# Altium PCB PCB_MP3Player(DAC)_V3.0.pcbdoc
Units mil, origin at the board's own origin, x right, y up, seen from the top; angles counter-clockwise.
Board outline 3871.18 x 2553.93 mil, 2 copper layers (Top Layer, Bottom Layer); 41 components, 57 nets, 175 pads, 31 vias.
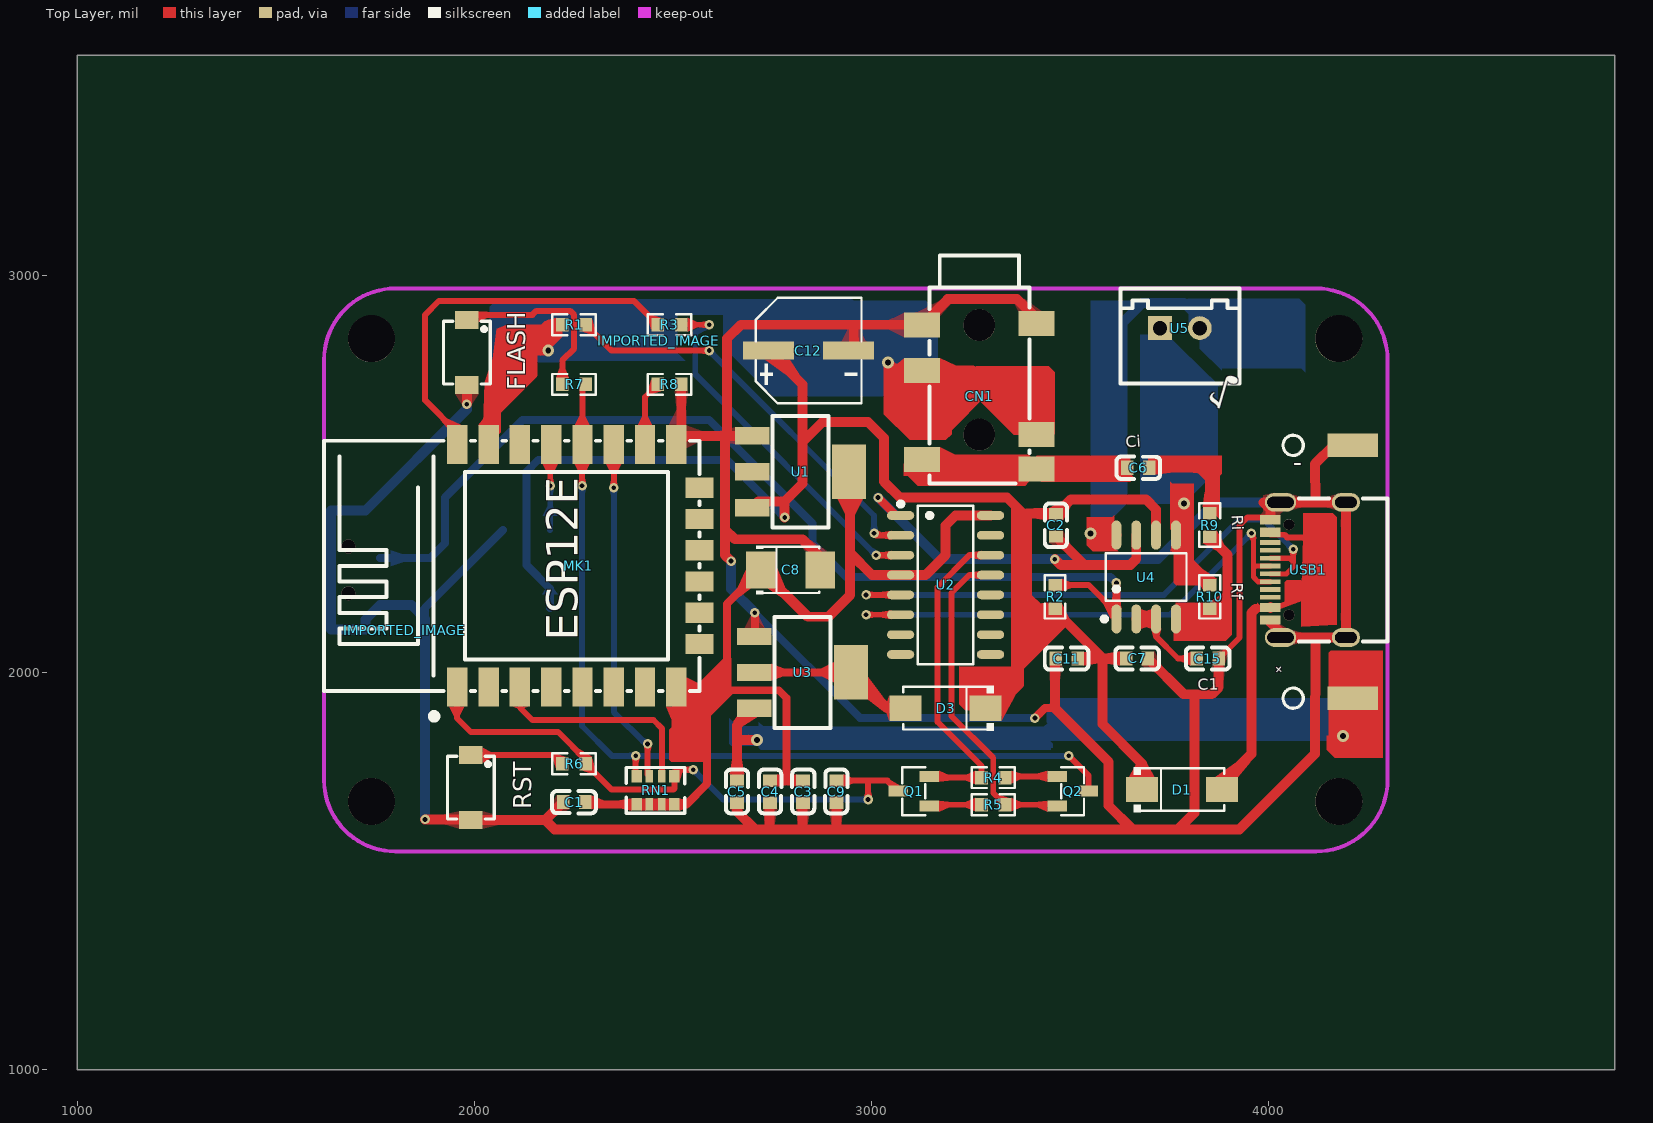
[diagram p0: Top Layer view]
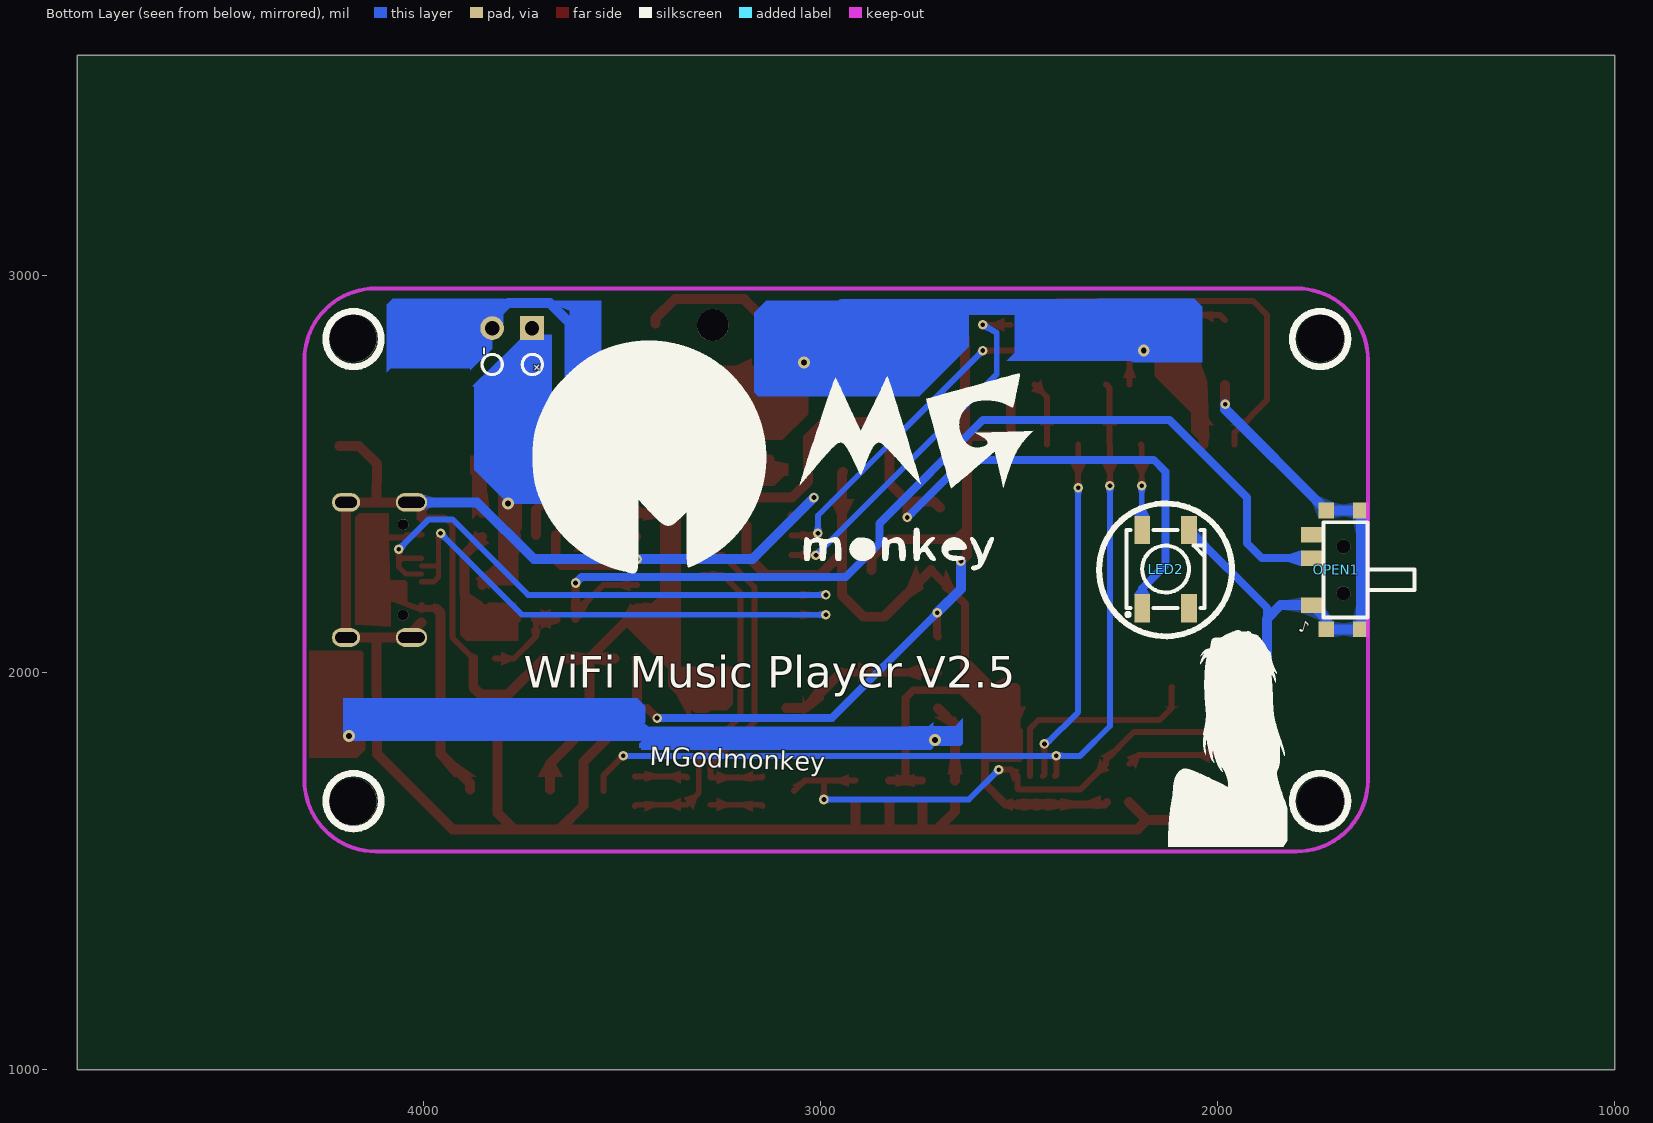
[diagram p1: Bottom Layer view, seen from below]

## Layer stack, top to bottom
Top Layer: signal copper (thickness not stored)
Dielectric: dielectric 12.6, FR-4, Dk 4.8
Bottom Layer: signal copper (thickness not stored)

## Board outline
4871.18,1000 1000,1000 1000,3553.93 4871.18,3553.93

## Components (designator, comment, footprint, x,y, rotation, side; value= is the part's Value field where it differs from the comment)
C1 "10uF" C0603 2251.18,1673.23 r0 top
C2 "10uF" C0603 3463.8,2370 r270 top
C3 "10uF" C0603 2827.85,1700 r270 top
C4 "0.1μF" C0603 2744.52,1700 r270 top
C5 "100nF" C0603 2661.18,1700 r270 top
C6 "1uF" C0603 3671.18,2515 r180 top
C7 "10uF" C0603 3668.07,2035 r180 top
C8 "100uF" CAP-SMD_L3.5-W2.8-R-RD 2796.18,2257.87 r180 top
C9 "100nF" C0603 2911.18,1700 r270 top
C11 "1uF" C0603 3491.18,2034.79 r0 top
C12 "220uF" CAP-SMD_BD6.3-L6.6-W6.6-RD 2841.18,2810 r180 top
C15 "1uF" C0603 3846.18,2034.79 r0 top
CN1 "PJ-342" AUDIO-SMD_PJ-342 3271.18,2695 r0 top
D1 "SS34" SMA_L4.4-W2.8-LS5.4-RD 3781.18,1705 r0 top
D3 "SS34" SMA_L4.4-W2.8-LS5.4-RD 3186.18,1910 r180 top
FLASH "BUTTON_FLASH" SMT_SW_PTS_820 1981.18,2805 r270 top
IMPORTED_IMAGE "IMPORTED_IMAGE" IMPORTED_IMAGE 2464.68,2834.89 r0 top
IMPORTED_IMAGE "IMPORTED_IMAGE" IMPORTED_IMAGE 1824.97,2105.84 r0 top
LED2 "WS2812B" LED-SMD_4P-L5.0-W5.0-TL 2131.18,2260 r270 bottom
MK1 "ESP-12E" WIFIM-SMD_ESP-12E-BR 2261.97,2268.12 r0 top
OPEN1 "SK-3296S-01-L1" SW-SMD_3P-P1.50_L2.7-W6.6 1701.18,2257.87 r270 bottom
Q1 "S8050" SOT-23-3_L2.9-W1.3-P1.90-LS2.4-BR 3106.18,1700.92 r0 top
Q2 "S8050" SOT-23-3_L2.9-W1.3-P1.90-LS2.4-BR 3506.18,1700.92 r180 top
R1 "470" R0603 2251.18,2875 r180 top
R2 "10k" R0603 3461.85,2190 r270 top
R3 "470" R0603 2491.18,2875 r180 top
R4 "10K" R0603 3306.18,1735 r180 top
R5 "10K" R0603 3306.18,1666.84 r0 top
R6 "470" R0603 2251.18,1770 r0 top
R7 "470" R0603 2251.18,2725 r0 top
R8 "12k" R0603 2491.18,2725 r0 top
R9 "10k" R0603 3851.18,2370.8 r90 top
R10 "30k" R0603 3851.18,2190 r270 top
RN1 "10k" RES-ARRAY-SMD_0603-8P-L3.2-W1.6-BL 2456.18,1703.15 r180 top
RST "BUTTON_RST" SMT_SW_PTS_820 1991.18,1710 r270 top
U1 "AMS1117-3.3" SOT-223_L6.7-W3.5-P2.30-BR 2821.18,2505 r180 top
U2 "CH340C" SOP-16_L10.0-W3.9-P1.27-LS6.0-BL 3186.18,2220 r270 top
U3 "AMS1117-5" SOT-223_L6.7-W3.5-P2.30-BR 2826.18,2000 r180 top
U4 "LTK8002D" SOP-8_L4.9-W3.9-P1.27-LS6.0-BL 3691.18,2240 r0 top
U5 "XH2.54-2P" XH2.54-2P 3726.18,2866.54 r0 top
USB1 "KH-TYPE-C-16P" USB-C-SMD_KH-TYPE-C-16P 4098.94,2257.86 r90 top

## Footprints (in the part's own frame and the unit in brackets; to place one, negate y for a bottom-side part, rotate by r counter-clockwise, add the part's x,y. Pads: shape width x height; smd on the part's side, far side on the other; paste and mask are expansions set on the pad)
AUDIO-SMD_PJ-342 [mm]
  rect 2.3x1.6 smd: 2(-3.65,4.55) 3(3.65,4.65) 4(-3.65,1.65) 5(3.65,-2.45) 6(-3.65,-4.05) 7(3.65,-4.65)
  round 2.032 hole 2.032 unplated: ""(0,-2.45) ""(0,4.55)
  silkscreen extent -3.2,-5.59 3.2,8.99
C0603 [mm]
  rect 0.8x0.9 smd: 1(-0.7,0) 2(0.7,0)
  silkscreen extent -1.41,-0.71 1.39,0.72
CAP-SMD_BD6.3-L6.6-W6.6-RD [mm]
  rect 3.26x1.15 smd: 1(2.555,0) 2(-2.555,0)
  silkscreen extent -3.39,-3.38 3.36,3.38
CAP-SMD_L3.5-W2.8-R-RD [mm]
  rect 1.9x2.376 smd: 1(1.899,0) 2(-1.899,0)
  silkscreen extent -1.83,-1.55 2.21,1.55
IMPORTED_IMAGE [mil]
LED-SMD_4P-L5.0-W5.0-TL [mm]
  rect 1.8x1 smd: 1(2.5,-1.5) 2(2.5,1.5) 3(-2.5,1.5) 4(-2.5,-1.5)
  silkscreen extent -2.5,-2.5 3,2.5
R0603 [mil]
  rect 31.75x34.02 smd: 1(-29.65,0) 2(29.66,0)
  silkscreen extent -55,-26 55,26
RES-ARRAY-SMD_0603-8P-L3.2-W1.6-BL [mm]
  rect 0.65x0.8 smd: 1(-1.2,-0.9) 4(1.2,-0.9) 5(1.2,0.9) 8(-1.2,0.9)
  rect 0.5x0.8 smd: 2(-0.4,-0.9) 3(0.4,-0.9) 6(0.4,0.9) 7(-0.4,0.9)
  silkscreen extent -1.87,-1.45 1.87,1.47
SMA_L4.4-W2.8-LS5.4-RD [mm]
  rect 2.046x1.62 smd: 1(-2.566,0) 2(2.565,0)
  silkscreen extent -3.08,-1.44 2.7,1.44
SMT_SW_PTS_820 [mil]
  rect 45x59.05 smd: 1(-81.69,0) 2(81.69,0)
  round 0.5 all layers, no hole: MH1(0,35.43) MH2(0,-35.43)
  silkscreen extent -79,-59 79,59
SOP-8_L4.9-W3.9-P1.27-LS6.0-BL [mm]
  oval 0.63x1.865 smd: 1(-1.905,-2.682) 2(-0.635,-2.682) 3(0.635,-2.682) 4(1.905,-2.682) 5(1.905,2.682) 6(0.635,2.682) 7(-0.635,2.682) 8(-1.905,2.682)
  silkscreen extent -2.82,-2.83 2.58,1.52
SOP-16_L10.0-W3.9-P1.27-LS6.0-BL [mm]
  oval 0.56x1.745 smd: 1(-4.445,-2.873) 2(-3.175,-2.873) 3(-1.905,-2.873) 4(-0.635,-2.873) 5(0.635,-2.873) 6(1.905,-2.873) 7(3.175,-2.873) 8(4.445,-2.873) 9(4.445,2.873) 10(3.175,2.873) 11(1.905,2.873) 12(0.635,2.873) 13(-0.635,2.873) 14(-1.905,2.873) 15(-3.175,2.873) 16(-4.445,2.873)
  silkscreen extent -5.33,-3.02 5.08,1.77
SOT-23-3_L2.9-W1.3-P1.90-LS2.4-BR [mm]
  rect 1.25x0.7 smd: 1(1,-0.95) 2(1,0.95) 3(-1,0)
  silkscreen extent -0.73,-1.53 0.73,1.53
SOT-223_L6.7-W3.5-P2.30-BR [mm]
  rect 2.2x1.1 smd: 1(3.099,-2.3) 2(3.099,0) 3(3.099,2.3)
  rect 2.2x3.5 smd: 4(-3.099,0)
  silkscreen extent -1.8,-3.55 1.8,3.55
SW-SMD_3P-P1.50_L2.7-W6.6 [mm]
  rect 1x1 smd: 0(-3.8,-0.641) 0(-3.8,1.559) 0(3.8,-0.641) 0(3.8,1.559)
  rect 1x1.4 smd: 1(2.25,-1.559) 2(-0.75,-1.559) 3(-2.25,-1.559)
  round 0.9 hole 0.9 unplated: ""(-1.5,0.459) ""(1.5,0.459)
  silkscreen extent -3.05,-0.81 3.05,4.98
USB-C-SMD_KH-TYPE-C-16P [mm]
  oval 1.2x2 hole 0.7 slot 1.7 at 90 deg: 1(-4.32,1.765) 2(4.32,1.765)
  oval 1.2x1.8 hole 0.7 slot 1.4 at 90 deg: 3(-4.32,-2.415) 4(4.32,-2.415)
  rect 0.3x1.3 smd: A1(-3.35,2.415) A4(-2.55,2.415) A5(-1.25,2.415) A6(-0.25,2.415) A7(0.25,2.415) A8(1.25,2.415) A9(2.55,2.415) A12(3.35,2.415) B1(3.05,2.415) B4(2.25,2.415) B5(1.75,2.415) B6(0.75,2.415) B7(-0.75,2.415) B8(-1.75,2.415) B9(-2.25,2.415) B12(-3.05,2.415)
  round 0.7 hole 0.7 unplated: ""(-2.89,1.235) ""(2.89,1.235)
  silkscreen extent -4.57,-5.08 4.57,0.57
WIFIM-SMD_ESP-12E-BR [mm]
  rect 1.3x2.5 smd: 1(-7.74,-7.75) 2(-5.74,-7.75) 3(-3.74,-7.75) 4(-1.74,-7.75) 5(0.26,-7.75) 6(2.26,-7.75) 7(4.26,-7.75) 8(6.26,-7.75) 15(6.26,7.75) 16(4.26,7.75) 17(2.26,7.75) 18(0.26,7.75) 19(-1.74,7.75) 20(-3.74,7.75) 21(-5.74,7.75) 22(-7.74,7.75)
  rect 1.8x1.3 smd: 9(7.74,-5.001) 10(7.739,-3.001) 11(7.739,-1.001) 12(7.739,0.999) 13(7.739,2.999) 14(7.74,4.999)
  silkscreen extent -16.26,-9.82 7.74,8
XH2.54-2P [mil]
  rect 60x60 hole 36: 1(0,0)
  round 60 hole 36: 2(100,0)
  silkscreen extent -100,-140 200,100

## Free pads (board coordinates)
  rect 125.98x59.05 smd: 4(4211.18,1935) 4(4211.18,2571.52)
  round 118.11 hole 118.11 unplated: ""(1741.18,1675) ""(1741.18,2840) ""(4176.18,1675) ""(4176.18,2840)

## Via types
v1: diameter 24, hole 12, Top Layer to Bottom Layer, 25 vias
v2: diameter 30, hole 15, Top Layer to Bottom Layer, 6 vias

## Nets (pads, with @x,y where several pads share a name; then routed paths per layer and width w, separated by ;. In a path a pad name is that pad's centre, name@x,y a point inside that pad or via, vN(x,y) a via of type N, cw(c..) or ccw(c..) an arc to the next point about the centre after c; other vN are vias at no path point)
ADC: MK1.2
C15_1: C15.1 U4.2 U4.3 | length 219.7
  Top Layer w15: U4.3 3716.18,2090 3771.38,2034.8 C15.1
  Top Layer w25: U4.2 U4.3
D_N: U2.6 USB1.A7 USB1.B7 | length 1346.2
  Top Layer w13: v1(3956.18,2350) 3961.18,2345 3961.18,2262.7 ; USB1.B7@4003.88,2228.3 3972.88,2228.3 3961.18,2240 3961.18,2262.7 ; USB1.A7@4003.88,2267.7 3966.18,2267.7 3961.18,2262.7
  Top Layer w15: v1(2986.18,2145) U2.6
  Bottom Layer w15: v1(2986.18,2145) 3751.18,2145 v1(3956.18,2350)
D_P: U2.5 USB1.A6 USB1.B6 | length 1442.5
  Top Layer w13: USB1.A6 4044.18,2248 4061.18,2265 4061.18,2277.4 ; USB1.B6 4051.18,2287.4 4061.18,2277.4 ; v1(4061.18,2310) 4061.18,2277.39
  Top Layer w15: v1(2986.18,2195) U2.5
  Bottom Layer w15: v1(2986.18,2195) 3736.18,2195 3926.18,2385 3986.18,2385 v1(4061.18,2310)
DTR: Q2.2 R5.2 U2.13 | length 838
  Top Layer w15: U2.13 3246.18,2245 3201.18,2200 3201.18,1890 3306.18,1785 3306.18,1696.5 3335.88,1666.8 3463.48,1666.8 Q2.2
EN: MK1.3 RN1.2 | length 551.1
  Top Layer w15: MK1.3 2116.18,1961.6 2116.18,1910 2146.18,1880 2451.18,1880 2471.98,1859.3 RN1.2@2471.98,1738.6
GND: C1.1 C2.2 C3.2 C4.2 C5.2 C7.1 C8.2 C9.2 C11.1 C12.2 C15.2 CN1.2 CN1.3 FLASH.2 LED2.3 MK1.15 OPEN1.0 OPEN1.1 pad.4@4211.18,2571.52 R8.2 RST.2 U1.1 U2.1 U3.1 U4.7 USB1.1 USB1.2 USB1.3 USB1.4 USB1.A1 USB1.A12 USB1.B1 USB1.B12 | length 12452.3
  Top Layer w15: C15.2@3873.78,2034.8 3926.18,2087.2 3926.18,2370 3945.98,2389.8 USB1.A12@4003.88,2389.8
  Top Layer w20: U3.1@2704.18,2090.5 2706.18,2092.5 v1(2706.18,2150) ; v1(3016.18,2440) 3061.18,2395 U2.1 ; v1(3411.18,1885) 3436.18,1910 3461.18,1910
  Top Layer w25: v1(1876.18,1630) 1989.48,1630 RST.2 2178.68,1628.3 ; v1(1981.18,2675) FLASH.2 ; C1.1 2178.68,1628.3 ; R8.2@2520.88,2725 2520.88,2573.2 2508.48,2573.2 2530.78,2595.5 U1.1@2699.18,2595.5 ; v1(2646.18,2280) 2631.18,2295 2631.18,2360 ; C5.2 2661.18,1650 2706.18,1605 ; 2743.28,1605 2743.28,1671.2 C4.2 ; 2826.28,1605 2826.28,1670.9 C3.2@2827.88,1672.4 ; C8.2@2870.98,2257.9 2870.98,2290.2 2826.18,2335 2656.18,2335 2631.18,2360 ; C9.2 2911.28,1605 ; C12.2 2956.18,2810 2955.18,2875 CN1.2 3191.18,2937.8 3191.18,2940 3366.18,2940 3414.88,2891.3 CN1.3 ; 3021.18,2875 2671.18,2875 2636.18,2840 2636.18,2598.5 2633.28,2595.5 2631.18,2593.5 2631.18,2360 ; v1(3461.18,2285) 3476.18,2270 3536.24,2270 ; C11.1 3461.18,2032.3 3461.18,1910 3596.18,1775 3596.18,1665 3656.18,1605 3771.18,1605 ; C2.2 3536.28,2270 3651.18,2270 3666.18,2285 U4.7 ; 3669.28,1605 2706.18,1605 ; C7.1 3785.58,1945 3856.18,1945 3873.78,1962.6 C15.2@3873.78,2034.8 ; 3812.68,1945 3812.68,1646.5 3771.18,1605 ; USB1.A1@4003.88,2126 4029.48,2100.4 4029.48,2087.8 USB1.3 USB1.4 4029.48,2427.9 3986.18,2427.9 4003.88,2410.3 USB1.A12@4003.88,2389.8 ; 4117.08,2087.8 4116.18,1795 3926.18,1605 3771.18,1605 ; 4117.18,2427.9 4116.18,2525 4161.18,2570 pad.4@4211.18,2570 ; 2178.7,1628.31 2202.01,1605 2706.18,1605
  Bottom Layer w20: 1876.18,2118.6 1876.18,2162.5 LED2.3 ; v1(2706.18,2150) 2971.18,1885 v1(3411.18,1885)
  Bottom Layer w25: v1(1876.18,1630) 1876.18,2135 1841.88,2169.3 OPEN1.1 1726.38,2133.2 1726.38,2108.3 1639.78,2108.3 1639.78,2407.5 1726.38,2407.5 1981.18,2662.2 v1(1981.18,2675) ; v1(2646.18,2280) 2646.18,2210 v1(2706.18,2150) ; v1(3016.18,2440) 3171.18,2285 v1(3461.18,2285) 3721.18,2285 3864.08,2427.9 USB1.2@4029.48,2427.9
GPIO0: MK1.18 Q2.3 R7.2 RN1.4 | length 2282.2
  Top Layer w15: v1(2271.18,2470) 2271.18,2572.2 MK1.18 2272.18,2716.4 R7.2@2280.88,2725 ; v1(2406.18,1790) 2406.18,1741.3 RN1.4@2408.98,1738.6 ; v1(3496.18,1790) 3545.55,1740.63 Q2.3@3545.55,1700.92
  Bottom Layer w15: v1(2271.18,2470) 2271.18,1865 2346.18,1790 v1(2406.18,1790) v1(3496.18,1790)
GPIO2: MK1.17 RN1.3 | length 874.5
  Top Layer w15: MK1.17@2350.98,2573.2 v1(2351.18,2465) ; v1(2436.18,1820) 2436.18,1742.8 RN1.3
  Bottom Layer w15: v1(2351.18,2465) 2351.18,1900 2431.18,1820 v1(2436.18,1820)
GPIO4: LED2.4 MK1.19 | length 215.8
  Top Layer w15: v1(2191.18,2470) 2191.18,2571 MK1.19
  Bottom Layer w15: LED2.4 v1(2191.18,2470)
GPIO5: MK1.20
GPIO9: MK1.11
GPIO10: MK1.12
GPIO12: MK1.6
GPIO13: MK1.7
GPIO14: MK1.5
GPIO15: MK1.16 R8.1 | length 165
  Top Layer w15: MK1.16 2429.68,2693.2 R8.1
GPIO16: MK1.4
IN-: R9.1 R10.2 U4.4 | length 319.8
  Top Layer w25: U4.4 3825.18,2134.4 R10.2 3861.48,2160.3 3896.18,2195 3896.18,2296.1 R9.1
LED2_2: LED2.2
NRST: C9.1 MK1.1 Q1.3 R6.2 RN1.1 | length 1478.5
  Top Layer w15: MK1.1@1957.28,1963 1956.18,1961.9 1956.18,1885 1991.18,1850 2211.18,1850 2280.88,1780.3 2280.88,1770 2345.88,1705 2501.18,1705 2503.38,1707.2 RN1.1 2519.88,1755 v1(2551.18,1755) ; C9.1 3040.18,1727.6 Q1.3 ; 2990.88,1727.6 v1(2991.18,1680)
  Bottom Layer w15: v1(2551.18,1755) 2626.18,1680 v1(2991.18,1680)
OPEN1_3: OPEN1.3
OUT_N: U4.8 U5.2 | length 885.7
  Top Layer w25: v2(3551.18,2350) 3611.78,2350 U4.8
  Bottom Layer w25: v2(3551.18,2350) 3631.18,2430 3631.18,2880 3681.18,2930 3786.18,2930 3826.18,2890 U5.2
OUT_P: R10.1 U4.5 U5.1 | length 715.1
  Top Layer w25: v2(3786.18,2425) 3786.18,2365.6 U4.5 3766.18,2310 3851.18,2225 R10.1
  Bottom Layer w25: U5.1 3726.18,2775 3786.18,2715 v2(3786.18,2425)
R1_1: R1.1 U2.2 | length 1038.1
  Top Layer w15: R1.1@2280.88,2875 2345.88,2810 v1(2591.18,2810) ; v1(3006.18,2350) 3011.18,2345 U2.2
  Bottom Layer w15: v1(2591.18,2810) 3006.18,2395 v1(3006.18,2350)
R2_1: OPEN1.2 R2.1 U4.1 | length 2553.6
  Top Layer w15: R2.1@3461.88,2219.7 3546.18,2220 3616.18,2150 U4.1
  Top Layer w20: U4.1 v1(3616.18,2225)
  Bottom Layer w20: OPEN1.2 1888.58,2287.4 1926.18,2325 1926.18,2440 2121.18,2635 2591.18,2635 2851.18,2375 2851.18,2325 2936.18,2240 3601.18,2240 v1(3616.18,2225)
R4_1: Q2.1 R4.1 | length 132.3
  Top Layer w15: R4.1@3335.88,1735 3339.18,1738.3 Q2.1
R5_1: Q1.1 R5.1 | length 132.3
  Top Layer w15: Q1.1@3145.58,1663.5 3148.88,1666.8 R5.1
R7_1: FLASH.1 R7.1 | length 471.1
  Top Layer w15: FLASH.1 1994.48,2900 2146.18,2900 2156.18,2910 2241.18,2910 2251.18,2900 2251.18,2815 2221.48,2785.3 R7.1
R9_2: C6.1 R9.2 | length 252.3
  Top Layer w25: C6.1@3698.78,2515 3826.18,2515 3851.18,2490 R9.2
RST_1: R6.1 RST.1 | length 239.3
  Top Layer w15: RST.1 2199.88,1791.7 R6.1
RTS: Q1.2 R4.2 U2.14 | length 824.2
  Top Layer w15: Q1.2@3145.58,1738.3 3148.88,1735 R4.2 3276.48,1764.7 3166.18,1875 3166.18,2215 3246.18,2295 U2.14
RX: C6.2 CN1.6 CN1.7 | length 527.2
  Top Layer w25: CN1.6 3391.28,2535.5 CN1.7 3640.58,2511.9 C6.2
RXD0: CN1.4 CN1.5 MK1.21 R1.2 | length 1881.1
  Top Layer w25: MK1.21 2036.18,2640 2146.18,2750 2146.18,2835 2186.18,2875 R1.2 ; 2146.18,2807.71 2148.47,2810 v2(2186.18,2810) ; v2(3041.18,2780) 3061.18,2760 CN1.4 3253.48,2760 CN1.5
  Bottom Layer w30: v2(2186.18,2810) 2301.18,2925 2946.18,2925 3041.18,2830 v2(3041.18,2780)
SPI_CLK: MK1.14
SPI_CS: MK1.9
SPI_MISO: MK1.10
SPI_MOSI: MK1.13
TXD0: MK1.22 R3.2 | length 985
  Top Layer w15: MK1.22@1957.28,2573.2 1957.28,2603.9 1876.18,2685 1876.18,2900 1911.18,2935 2401.48,2935 R3.2
U2_3: R3.1 U2.3 | length 921
  Top Layer w15: R3.1@2520.88,2875 v1(2591.18,2875) ; v1(3011.18,2295) U2.3
  Bottom Layer w15: v1(2591.18,2875) 2556.18,2855 2556.18,2750 v1(3011.18,2295)
U2_7: U2.7
U2_8: U2.8
U2_9: U2.9
U2_10: U2.10
U2_11: U2.11
U2_12: U2.12
U2_15: U2.15
U3_4: D3.2 U3.2 U3.4 | length 418.3
  Top Layer w20: U3.2 U3.4
  Top Layer w25: U3.4 3038.18,1910 D3.2
USB1_A5: USB1.A5
USB1_A8: USB1.A8
USB1_B5: USB1.B5
USB1_B8: USB1.B8
VDD3V3: C1.2 C3.1 C4.1 C8.1 MK1.8 RN1.5 RN1.6 RN1.7 RN1.8 U1.4 U2.4 U2.16 | length 2748.2
  Top Layer w20: C1.2@2278.78,1673.2 2284.28,1667.7 RN1.5@2408.98,1667.7 ; RN1.8 2533.88,1667.7 2586.18,1720 2586.18,1785 ; C8.1 2636.18,2172.6 2636.18,2030 2569.18,1963 2508.48,1963 2506.18,1960.8 2506.18,1865 2586.18,1785 ; C4.1 C3.1@2827.88,1727.6 ; 2786.18,1730 2786.18,1935 2766.18,1955 2646.18,1955 2586.18,1895 2586.18,1785
  Top Layer w25: RN1.5@2408.98,1667.7 RN1.6 2471.98,1667.7 RN1.8 ; C8.1 2839.28,2140 2891.18,2140 2946.18,2195 2946.18,2300 ; U1.4 2946.18,2502 2946.18,2300 ; U2.16 3211.18,2395 3186.18,2370 3186.18,2295 3136.18,2245 U2.4 3001.18,2245 2946.18,2300
VDD5V: C2.1 C7.2 C11.2 C12.1 D1.1 D3.1 LED2.1 R2.2 U1.3 U4.6 | length 4117.7
  Top Layer w25: U1.3@2699.18,2414.5 2714.68,2430 2781.18,2430 ; C12.1 2826.18,2724.4 2826.18,2580 ; v1(2781.18,2390) 2781.18,2430 ; D3.1 3311.18,1910 3371.18,1970 3371.18,2014 3487.48,2130.3 ; 3391.18,2370 3391.18,2390 3341.18,2440 3071.18,2440 3031.18,2480 3031.18,2590 2991.18,2630 2876.18,2630 2826.18,2580 ; C11.2@3518.78,2034.8 C7.2 ; D1.1 3680.18,1771 3581.18,1870 3581.18,2033.2 3582.88,2034.9 3461.88,2155.9 3461.88,2160.3 3420.88,2160.3 3391.18,2190 3391.18,2400 3461.38,2400 C2.1 3501.28,2435 3691.18,2435 3716.18,2410 U4.6 ; 2781.18,2430 2826.18,2475 2826.18,2580
  Bottom Layer w20: LED2.1 2190.18,2210.9 2131.18,2270 2131.18,2505 2161.18,2535 2636.18,2535 v1(2781.18,2390)
VDDUSB: D1.2 USB1.A4 USB1.A9 USB1.B4 USB1.B9 | length 890.3
  Top Layer w15: 3966.18,2160 3994.58,2160 4003.88,2169.3 4003.88,2157.5 4106.18,2195 4106.18,2320 4086.18,2340 4046.18,2340 4039.78,2346.4 USB1.B4
  Top Layer w25: D1.2 3882.18,1721 3956.18,1795 3956.18,2150 3966.18,2160
VIN: C5.1 pad.4@4211.18,1935 U3.3 | length 1868.8
  Top Layer w25: C5.1 2661.18,1866.5 U3.3@2704.18,1909.5 ; 2661.18,1828.81 2662.37,1830 v2(2711.18,1830) ; v2(4186.18,1840) 4186.18,1910 4211.18,1935 4221.18,1945 pad.4@4241.18,1945
  Bottom Layer w25: v2(2711.18,1830) 2716.18,1835 3441.18,1835 3446.18,1840 v2(4186.18,1840)
XXD: U1.2
pads on no net: CN1. FLASH.MH1 FLASH.MH2 OPEN1. RST.MH1 RST.MH2 USB1.

## Polygon pours and split planes (outlines as drawn)
GND on Top Layer (solid): 1591.18,2990 1616.18,3015 4286.18,3015 4371.18,2930 4371.18,1500 4346.18,1525 1571.18,1525
GND on Bottom Layer (solid): 1586.18,3035 1611.18,3010 4306.18,3010 4326.18,2990 4326.18,1520 4306.18,1540 1556.18,1540

## Keep-outs
Keep-Out Layer:
  lines w10: 1621.77,1729.21 ccw(c1801.77,1729.21) 1801.77,1549.21 ; 1621.77,2786.54 cw(c1801.77,2786.54) 1801.77,2966.54 ; 4118.94,1549.21 ccw(c4118.94,1729.21) 4298.94,1729.21 ; 4118.94,2966.54 cw(c4118.94,2786.54) 4298.94,2786.54

## Other copper
Top Layer:
  region net VIN: 4286.18,1865 4286.18,1785 4166.18,1785 4146.18,1805 4146.18,1840 4151.18,1840 4151.18,2050 4156.18,2055 4286.18,2055 4286.18,1865
  region net VDD5V: 3489.48,2128.3 3452.78,2165 3391.18,2165 3391.18,2060
  region net VDD5V: 3351.18,2010 3351.18,2430 3381.18,2400 3401.18,2400 3401.18,2115 3419.18,2097 3419.18,2068.58 3351.18,2010 3466.68,2109.5 3419.18,2062 3419.18,2068.58 3466.68,2109.5 3486.98,2129.8 3466.68,2109.5 3466.68,2110.5 3486.98,2130.8 3486.98,2129.8
  region net VDD5V: 3287.18,1910 3282.18,1905 3236.18,1905 3221.18,1920 3221.18,2015 3222.18,2014 3371.18,2014 3371.18,1970
  region net VDD3V3: 2506.18,1865 2501.18,1860 2496.18,1860 2491.18,1855 2491.18,1780 2496.18,1775 2586.18,1775
  region net VDD3V3: 2646.18,1990 2646.18,1955 2596.18,1905 2556.18,1905
  region net VDD3V3: 2506.18,1875 2578.68,1802.5 2578.68,1792.5 2591.18,1805 2591.18,1930 2646.18,1985 2646.18,2035
  region net VDD3V3: 2508.43,1963.01 2510.42,1965 2601.18,1965 2511.18,1875 2506.18,1875 2506.18,1895
  region net OUT_P: 3762.76,2381.84 3778.58,2326.76 3786.18,2347.93 3777.34,2374.45
  region net OUT_N: 3603.78,2321.3 3603.78,2369.92 3566.28,2362.5 3566.28,2337.5
  region net IN-: 3778.58,2158.7 3778.58,2110.08 3816.08,2121.89 3816.08,2146.89
  region net C15_1: 3728.58,2110.08 3703.78,2110.08 3708.68,2090 3723.68,2090
  region net C15_1: 3703.78,2110.08 3703.78,2158.7 3666.28,2146.89 3666.28,2121.89
  region net C15_1: 3678.58,2158.7 3678.58,2110.08 3716.08,2121.89 3716.08,2146.89
  region net R2_1: 3603.78,2133.78 3611.99,2170.37 3586.72,2190.06 3584.82,2170.76
  region net R2_1: 3628.58,2158.7 3603.78,2158.7 3606.18,2188.7 3626.18,2188.7
  region net DTR: 3275.94,2233.98 3275.94,2256.02 3253.44,2252.5 3253.44,2237.5
  region net RTS: 3275.94,2283.98 3275.94,2306.02 3253.44,2302.5 3253.44,2287.5
  region net D_N: 3049.76,2133.98 3049.76,2156.02 3027.26,2152.5 3027.26,2137.5
  region net D_P: 3049.76,2183.98 3049.76,2206.02 3027.26,2202.5 3027.26,2187.5
  region net U2_3: 3049.76,2283.98 3049.76,2306.02 3027.26,2302.5 3027.26,2287.5
  region net R1_1: 3049.76,2333.98 3049.76,2356.02 3027.26,2352.5 3027.26,2337.5
  region net VDDUSB: 4022.62,2163.38 3985.12,2163.38 3996.35,2157.49 4011.35,2157.47
  region net VDDUSB: 4016.7,2163.38 4005.18,2160 3995.05,2163.38 3979.2,2163.38 3989.27,2165.3 3995.05,2163.38 4016.7,2163.38
  region net VDDUSB: 3985.12,2163.38 4022.62,2163.38 4011.38,2169.28 3996.38,2169.3
  region net VDDUSB: 3979.2,2163.38 4016.7,2163.38 3993.25,2169.28 4009.16,2163.98
  region net U3_4: 2747.49,2021.65 2747.49,1978.35 2777.49,1990 2777.49,2010
  region net VIN: 2713.78,1887.8 2660.87,1887.8 2652.34,1875.29 2678.86,1866.45
  region net U3_4: 2904.87,1975 2904.87,2025 2874.87,2010 2874.87,1990
  region net U3_4: 2991.49,1987.94 2991.49,1931.1 3028.99,1901.52 3028.99,1936.87
  region net VDD3V3: 2977.43,2436.1 2914.93,2436.1 2933.68,2398.6 2958.68,2398.6
  region net RST_1: 2020.71,1810.44 2020.71,1772.94 2043.21,1784.19 2043.21,1799.19
  region net NRST: 2497.78,1754.33 2516.22,1722.83 2523.75,1748.31 2514.53,1760.3
  region net VDD3V3: 2490.62,1651.97 2490.62,1683.46 2471.93,1680.21 2471.93,1655.21
  region net VDD3V3: 2516.22,1683.46 2516.22,1651.97 2533.9,1657.71 2533.9,1677.71
  region net VDD3V3: 2462.09,1651.97 2462.09,1683.46 2440.43,1680.21 2440.43,1655.21
  region net VDD3V3: 2481.77,1683.46 2481.77,1651.97 2503.42,1655.21 2503.42,1680.21
  region net VDD3V3: 2430.59,1651.97 2430.59,1683.46 2408.94,1680.21 2408.94,1655.21
  region net VDD3V3: 2450.27,1683.46 2450.27,1651.97 2471.93,1655.21 2471.93,1680.21
  region net VDD3V3: 2396.15,1651.97 2396.15,1683.46 2366.15,1677.71 2366.15,1657.71
  region net VDD3V3: 2421.74,1683.46 2421.74,1651.97 2440.43,1655.21 2440.43,1680.21
  region net OUT_P: 3834.17,2209.24 3868.19,2235.53 3835.89,2257.96 3815.95,2242.55
  region net IN-: 3868.19,2144.47 3834.17,2176.22 3816.39,2143.23 3834.37,2125.86
  region net IN-: 3849.43,2176.22 3868.19,2144.47 3893.76,2174.9 3880.63,2197.13
  region net IN-: 3868.19,2357.02 3834.17,2325.27 3868.57,2306.08 3886.85,2323.15
  region net R9_2: 3834.17,2416.33 3868.19,2416.33 3863.68,2453.83 3838.68,2453.83
  region net GPIO15: 2469.2,2707.99 2445.65,2737.18 2437.44,2711.52 2446.91,2699.78
  region net R7_1: 2237.4,2742.01 2205.65,2742.01 2214.02,2764.51 2229.02,2764.51
  region net RST_1: 2205.65,1757.82 2229.2,1787.01 2206.91,1795.22 2197.44,1783.48
  region net NRST: 2264.96,1784.37 2296.71,1787.01 2264.84,1806.94 2245.26,1805.32
  region net NRST: 2296.71,1782.18 2273.16,1752.99 2295.45,1744.78 2304.92,1756.52
  region net R5_1: 3260.65,1683.85 3260.65,1649.83 3238.15,1659.34 3238.15,1674.34
  region net DTR: 3351.71,1683.85 3351.71,1649.83 3374.21,1659.34 3374.21,1674.34
  region net DTR: 3319.96,1654.68 3343.53,1683.85 3321.23,1692.06 3311.75,1680.32
  region net R4_1: 3351.71,1719.57 3351.71,1752.01 3374.21,1745.82 3374.21,1730.82
  region net RTS: 3260.65,1717.99 3260.65,1752.01 3238.15,1742.5 3238.15,1727.5
  region net U2_3: 2536.71,2857.99 2536.71,2892.01 2559.21,2882.5 2559.21,2867.5
  region net TXD0: 2445.65,2862.82 2469.2,2892.01 2446.91,2900.22 2437.44,2888.48
  region net R2_1: 3478.86,2203.78 3478.86,2235.53 3501.36,2227.32 3501.36,2212.32
  region net VDD5V: 3444.84,2144.47 3444.84,2176.22 3420.84,2172.84 3420.84,2147.84
  region net VDD5V: 3478.86,2173.36 3444.84,2144.47 3477.27,2122.81 3496.39,2139.05
  region net R1_1: 2296.71,2887.27 2273.28,2857.99 2295.51,2849.76 2304.94,2861.55
  region net RXD0: 2205.65,2857.99 2205.65,2892.01 2186.18,2887.5 2186.18,2862.5
  region net DTR: 3442.21,1649.74 3442.21,1677.3 3419.71,1674.34 3419.71,1659.34
  region net R4_1: 3442.21,1724.54 3442.21,1752.1 3419.71,1745.82 3419.71,1730.82
  region net NRST: 3042.21,1714.7 3071.78,1714.7 3050.78,1727.56 3034.87,1722.26
  region net RTS: 3170.16,1752.1 3170.16,1724.54 3192.66,1727.5 3192.66,1742.5
  region net R5_1: 3170.16,1677.3 3170.16,1649.74 3192.66,1659.34 3192.66,1674.34
  region net TXD0: 1931.65,2615.11 1968.43,2622.45 1933.39,2638.4 1915.7,2634.87
  region net RXD0: 2010.39,2622.45 2061.57,2622.45 2048.68,2639.96 2023.68,2640
  region net GPIO4: 2209.93,2524.03 2172.43,2524.03 2183.68,2501.53 2198.68,2501.53
  region net GPIO0: 2253.45,2622.45 2290.95,2622.45 2279.7,2644.95 2264.7,2644.95
  region net GPIO0: 2289.93,2524.03 2252.43,2524.03 2263.68,2501.53 2278.68,2501.53
  region net GPIO2: 2369.8,2524.03 2332.3,2524.03 2343.6,2501.53 2358.6,2501.53
  region net GPIO15: 2410.93,2622.45 2448.43,2622.45 2437.18,2644.95 2422.18,2644.95
  region net VDD3V3: 2534.02,1988.01 2534.02,1938.01 2564.02,1953.01 2564.02,1973.01
  region net VDD3V3: 2531.18,1913.79 2482.84,1913.79 2496.18,1883.79 2516.18,1883.79
  region net EN: 2134.93,1913.79 2097.43,1913.79 2108.68,1910 2123.68,1910
  region net NRST: 1974.93,1913.79 1937.43,1913.79 1948.68,1891.29 1963.68,1891.29
  region net R7_1: 2010.71,2909.19 2010.71,2881.25 2033.21,2892.5 2033.21,2907.5
  region net VDD5V: 3323.58,1941.89 3327.47,1879.51 3361.13,1942.27 3359.05,1975.55
  region net U3_4: 3044.9,1878.75 3044.9,1941.25 3038.18,1922.5 3038.18,1897.5
  region net VDD5V: 3711.43,1736.89 3648.93,1736.89 3667.68,1771 3692.68,1771
  region net VDDUSB: 3866.82,1736.89 3922.47,1736.89 3953.25,1774.39 3917.9,1774.39
  region net RX: 3460.16,2543.18 3460.16,2480.68 3497.66,2499.43 3497.66,2524.43
  region net RX: 3172.76,2566.8 3172.76,2504.3 3210.26,2523.05 3210.26,2548.05
  region net RXD0: 3369.61,2622.34 3431.63,2630.04 3370.82,2660.28 3339.36,2656.38
  region net RXD0: 3172.76,2791.21 3172.76,2728.71 3210.26,2747.46 3210.26,2772.46
  region net RXD0: 3082.21,2728.71 3082.21,2791.21 3061.22,2772.46 3061.22,2747.46
  region net C15_1: 3802.88,2017.07 3802.88,2052.5 3780.38,2042.29 3780.38,2027.29
  region net VDD5V: 2794.48,2787.36 2731.98,2787.36 2783.05,2749.86 2818.41,2749.86
  region net VDD5V: 3534.49,2052.5 3534.49,2017.07 3571.99,2022.38 3571.99,2047.38
  region net NRST: 2928.9,1743.31 2928.9,1711.81 2951.4,1720.06 2951.4,1735.06
  region net VDD3V3: 2693.98,2211.1 2684.03,2260.1 2662.88,2213.47 2667.66,2189.96
  region net VDD3V3: 2758.83,2270.85 2740.48,2211.1 2772.86,2188.77 2781.16,2215.82
  region net VDD5V: 3624.76,2017.28 3624.76,2052.72 3587.26,2047.41 3587.26,2022.41
  region net R9_2: 3714.49,2532.72 3714.49,2497.28 3751.99,2502.5 3751.99,2527.5
  region net RX: 3627.88,2497.28 3627.88,2532.72 3590.38,2524.43 3590.38,2499.43
  region net VIN: 2643.47,1743.31 2678.9,1743.31 2673.68,1780.81 2648.68,1780.81
  region net VDD3V3: 2762.23,1743.31 2762.23,1711.81 2792.23,1717.56 2792.23,1737.56
  region net VDD3V3: 2810.13,1711.81 2810.13,1743.31 2780.13,1737.56 2780.13,1717.56
  region net VDD5V: 3446.08,2413.31 3481.51,2381.81 3499.72,2415.8 3481,2432.44
  region net VDD5V: 3446.08,2381.81 3446.08,2413.31 3408.58,2412.5 3408.58,2387.5
  region net VDD3V3: 2294.49,1690.94 2294.49,1655.51 2324.49,1657.71 2324.49,1677.71
  region net VIN: 2701.26,1818.75 2701.26,1841.25 2690.76,1842.5 2690.76,1817.5
  region net R2_1: 3607.18,2217.06 3625.18,2217.06 3626.18,2208.66 3606.18,2208.66
  region net GPIO4: 2182.18,2477.94 2200.18,2477.94 2198.68,2486.34 2183.68,2486.34
  region net R1_1: 3016.49,2356.14 3010.98,2339 3019.32,2337.5 3024.15,2352.5
  region net R1_1: 2583.24,2801 2583.24,2819 2574.84,2817.5 2574.84,2802.5
  region net RXD0: 3056.15,2780.94 3040.24,2765.03 3046.78,2756.72 3064.46,2774.4
  region net RXD0: 2176.26,2798.75 2176.26,2821.25 2165.76,2822.5 2165.76,2797.5
  region net OUT_N: 3561.1,2338.75 3561.1,2361.25 3571.6,2362.5 3571.6,2337.5
  region net OUT_P: 3797.43,2415.08 3774.93,2415.08 3773.68,2404.58 3798.68,2404.58
  region net NRST: 3000.13,1688 2982.13,1687.88 2983.57,1696.29 2998.57,1696.39
  region net NRST: 2543.24,1746 2543.24,1764 2534.84,1762.5 2534.84,1747.5
  region net U2_3: 2583.24,2866 2583.24,2884 2574.84,2882.5 2574.84,2867.5
  region net U2_3: 3019.12,2286 3019.12,2304 3027.52,2302.5 3027.52,2287.5
  region net GPIO2: 2427.18,1812.06 2445.18,1812.06 2443.68,1803.66 2428.68,1803.66
  region net GPIO0: 2397.18,1782.06 2415.18,1782.06 2413.68,1773.66 2398.68,1773.66
  region net GPIO2: 2360.16,2472.96 2342.16,2472.92 2343.64,2481.32 2358.64,2481.35
  region net GPIO0: 2262.18,2477.94 2280.18,2477.94 2278.68,2486.34 2263.68,2486.34
  region net D_P: 2994.12,2186 2994.12,2204 3002.52,2202.5 3002.52,2187.5
  region net D_N: 2994.12,2136 2994.12,2154 3002.52,2152.5 3002.52,2137.5
  region net D_P: 4052.18,2302.06 4070.18,2302.06 4067.68,2293.66 4054.68,2293.66
  region net D_N: 3950.04,2339.69 3967.18,2345.2 3967.68,2336.54 3954.68,2332.36
  region net RXD0: 2116.54,2805.36 2116.18,2805 2111.18,2805 2116.54,2805.36 2186.18,2875 2221.52,2875 2221.52,2845.34 2186.18,2810 2116.54,2805.36
  region net RXD0: 2035.98,2573.24 2021.18,2588.04 2026.18,2730 2046.18,2790 2056.18,2865 2081.18,2875 2186.18,2875 2146.18,2835 2146.18,2750 2066.18,2670 2066.18,2605 2035.98,2574.8 2035.98,2573.24
  region net IN-: 3766.18,2134.39 3761.18,2129.39 3761.18,2080 3891.18,2080 3906.18,2095 3906.18,2185 3896.18,2195
  region net R9_2: 3851.18,2400.46 3851.18,2510 3856.18,2505 3881.18,2505 3876.18,2500 3876.18,2385 3860.72,2400.46 3851.18,2400.46
  region net R9_2: 3698.74,2515 3696.18,2517.56 3696.18,2545 3881.18,2545 3881.18,2500 3876.18,2495
  region net IN-: 3766.18,2134.39 3825.23,2134.39 3851.18,2160.34 3836.52,2175 3766.18,2175
  region net OUT_P: 3766.18,2310 3761.18,2305 3761.18,2225 3766.52,2219.66 3851.18,2219.66
  region net OUT_P: 3766.18,2345.61 3751.18,2360.61 3751.18,2480 3756.18,2475 3811.18,2475 3811.18,2360 3811.18,2265 3771.18,2305 3751.18,2305
  region net OUT_N: 3616.18,2345.61 3611.18,2350.61 3611.18,2395 3606.18,2390 3541.18,2390 3541.18,2320 3556.18,2305 3621.18,2305 3616.18,2310 3616.18,2345.61
  region net RXD0: 3253.46,2759.96 3263.5,2770 3446.18,2770 3461.18,2755 3461.18,2600 3459.72,2598.54 3414.88,2598.54
  region net RXD0: 3266.18,2690 3357.64,2598.54 3414.88,2598.54 3294.8,2718.62
  region net RXD0: 3196.18,2605 3292.3,2701.12 3292.3,2721.12 3253.46,2759.96 3181.18,2759.96
  region net RXD0: 3041.18,2780 3031.18,2770 3031.18,2650 3096.18,2585 3186.18,2585 3201.18,2600 3201.18,2759.96 3191.18,2759.96
  region net RX: 3127.48,2535.55 3391.26,2535.55 3396.18,2530.63 3396.18,2480 3386.18,2470 3116.18,2470 3091.18,2495 3081.18,2495 3081.18,2525
  region net VDDUSB: 4003.85,2157.47 4001.32,2160 3966.18,2160 3971.18,2165 3971.18,2175 3976.9,2169.28 4003.85,2169.28 4003.85,2157.47
  region net VDDUSB: 4083.7,2186.76 4081.18,2184.23 4081.18,2115 4171.18,2120 4171.18,2175
  region net VDDUSB: 4041.18,2165 4040.53,2165.65 4040.53,2226.77 4045.53,2231.77 4080.53,2231.77 4100.53,2211.77 4100.53,2186.77
  region net VDDUSB: 4086.18,2340 4086.18,2400 4161.18,2400 4171.18,2390 4171.18,2285 4171.18,2190 4171.18,2120 4116.18,2175 4086.18,2175 4081.18,2175
  region net RX: 3426.18,2480 3436.18,2490 3436.81,2490 3414.88,2511.93 3414.88,2543.7 3416.18,2545 3646.18,2545 3651.18,2540 3651.18,2500 3661.18,2490 3651.18,2480 3426.18,2480
Bottom Layer:
  region net RXD0: 2218.68,2785 2213.68,2780 2038.68,2780 2038.68,2920 2058.68,2940 2303.68,2940
  region net VIN: 4171.18,1935 4201.18,1935 4201.18,1840 4196.18,1835 4161.18,1835
  region net VIN: 2731.18,1805 2721.18,1815 2646.18,1815 2641.18,1820 2641.18,1885 2661.18,1865 2776.18,1865
  region net R2_1: 1790.12,2267.72 1790.12,2307.09 1820.12,2297.4 1820.12,2277.4
  region net VDD5V: 2209.92,2197.01 2170.55,2197.01 2180.23,2210.95 2200.23,2210.95
  region net GPIO4: 2209.28,2393.86 2171.78,2393.86 2183.22,2416.36 2198.22,2416.36
  region net OUT_P: 3756.18,2836.54 3696.18,2836.54 3713.68,2799.04 3738.68,2799.04
  region net R2_1: 3616.93,2236.98 3604.2,2224.25 3597.56,2229.48 3611.7,2243.62
  region net VDD5V: 2781.93,2401.98 2769.2,2389.25 2762.56,2394.48 2776.7,2408.62
  region net GPIO4: 2200.11,2461.99 2182.11,2462.14 2183.54,2453.73 2198.54,2453.6
  region net R1_1: 2997.18,2357.94 3015.18,2357.94 3013.68,2366.34 2998.68,2366.34
  region net R1_1: 2603.16,2810.75 2590.43,2798.02 2597.43,2793.14 2608.04,2803.75
  region net OUT_N: 3566.15,2349.06 3550.24,2364.97 3556.78,2373.28 3574.46,2355.6
  region net OUT_P: 3797.43,2434.92 3774.93,2434.92 3773.68,2445.42 3798.68,2445.42
  region net NRST: 2983.24,1671 2983.24,1689 2974.84,1687.5 2974.84,1672.5
  region net NRST: 2563.16,1755.75 2550.43,1743.02 2557.43,1738.14 2568.04,1748.75
  region net U2_3: 2588.75,2863.25 2579.82,2878.88 2573.28,2873.41 2580.72,2860.38
  region net U2_3: 3011.93,2306.98 2999.2,2294.25 2994.33,2301.25 3004.93,2311.86
  region net GPIO2: 2434.32,1831.86 2424.65,1816.67 2418.27,1822.3 2426.53,1835.26
  region net GPIO0: 2398.24,1781 2398.24,1799 2389.84,1797.5 2389.84,1782.5
  region net GPIO2: 2342.18,2457.06 2360.18,2457.06 2358.68,2448.66 2343.68,2448.66
  region net GPIO0: 2262.18,2462.06 2280.18,2462.06 2278.68,2453.66 2263.68,2453.66
  region net D_P: 2994.12,2186 2994.12,2204 3002.52,2202.5 3002.52,2187.5
  region net D_N: 2994.12,2136 2994.12,2154 3002.52,2152.5 3002.52,2137.5
  region net D_P: 4061.93,2321.98 4049.2,2309.25 4044.33,2316.25 4054.93,2326.86
  region net D_N: 3956.93,2338.02 3944.2,2350.75 3939.33,2343.75 3949.93,2333.14
  region net OUT_N: 3840.06,2893.13 3798.06,2876.98 3798.75,2899.75 3824.29,2909.57
  region net VIN: 3446.18,1875 3431.18,1860 3426.18,1860 3441.18,1845 3506.18,1845
  region net VIN: 3461.18,1855 3441.18,1875 3441.18,1915 3461.18,1935 4181.18,1935 4176.18,1930 4176.18,1855
  region net VIN: 3458.68,1852.5 3476.18,1835 4171.18,1835 4176.18,1840 4176.18,1890 4166.18,1900 3486.18,1900
  region net VIN: 2711.18,1830 2716.18,1825 2716.18,1810 2721.18,1805 3451.18,1805 3451.18,1815
  region net VIN: 2711.18,1830 2716.18,1835 2716.18,1875 2728.68,1862.5 3468.68,1862.5 3441.18,1835 3456.18,1820 3456.18,1810 3451.18,1810
  region net RXD0: 2941.18,2930 2946.18,2935 3136.18,2935 3166.18,2905 3166.18,2705 3156.18,2695 3026.18,2695
  region net RXD0: 2631.18,2910 2626.18,2905 2626.18,2820 2751.18,2695 3031.18,2695 3041.18,2705 3041.18,2830 2941.18,2930
  region net RXD0: 2496.18,2925 2501.18,2920 2501.18,2900 2936.18,2900 2936.18,2925
  region net RXD0: 2186.18,2810 2211.18,2785 2531.18,2785 2511.18,2805 2511.18,2925 2301.18,2925 2288.68,2912.5
  region net OUT_P: 3726.18,2866.54 3709.64,2850 3676.18,2850 3676.18,2435 3686.18,2425 3786.18,2425 3871.18,2510 3871.18,2720 3876.18,2720
  region net OUT_N: 3681.18,2930 3676.18,2935 3551.18,2935 3551.18,2350 3631.18,2430 3631.18,2910
  region net OUT_N: 3951.18,2935 3956.18,2940 4076.18,2940 4091.18,2925 4091.18,2755 4081.18,2765 3876.18,2765 3866.18,2775 3866.18,2855
  region net OUT_N: 3786.18,2930 3796.18,2940 3971.18,2940 3881.18,2850 3881.18,2760 3826.18,2815 3826.18,2866.54

## Silkscreen, mask and mechanical layers (free items; w line width, h text height)
Top Overlay:
  circle w8: c4061.18,2571.52 r25.5
  circle w8: c4061.18,1935 r25.5
  text "♪" at 3941.18,2765 h150 r164
  text "-" at 4083.54,2557.72 h80 r180
  text "Ci" at 3641.18,2555 h50 r4
  text "Ri" at 3896.18,2395 h50 r272
  text "Rf" at 3896.18,2225 h50 r270
  text "﹢" at 4037.28,1975 h80 r49
  text "C1" at 3821.18,1945 h50 r1
Bottom Overlay:
  circle w17: c1742.13,2839.05 r70
  circle w17: c1742.13,1675.94 r70
  circle w17: c4175.23,1675.94 r70
  circle w17: c4175.23,2839.05 r70
  circle w15: c2131.18,2257.87 r167.2
  circle w8: c3826.18,2775 r25.5
  circle w8: c3725.08,2775 r25.5
  text "-" at 3812.38,2797.36 h80 r270
  text "﹢" at 3701.18,2735 h80 r311
  text "♪" at 1801.18,2095 h50 r16
  text "WiFi Music Player V2.5" at 3747.11,1961.81 h80
  text "MGodmonkey" at 3431.18,1750 h80 r2

## Text inside footprints (layer, text, board x,y; h text height)
MK1: Top Overlay "ESP12E" at 2260.24,2079.04 h80 r90